# Altium PCB BreakoutPcbDoc.PcbDoc
Units mil, origin at the board's own origin, x right, y up, seen from the top; angles counter-clockwise.
Board outline 1256 x 1006 mil, 2 copper layers (Top Layer, Bottom Layer); 3 components, 8 nets, 43 pads, 1 vias.
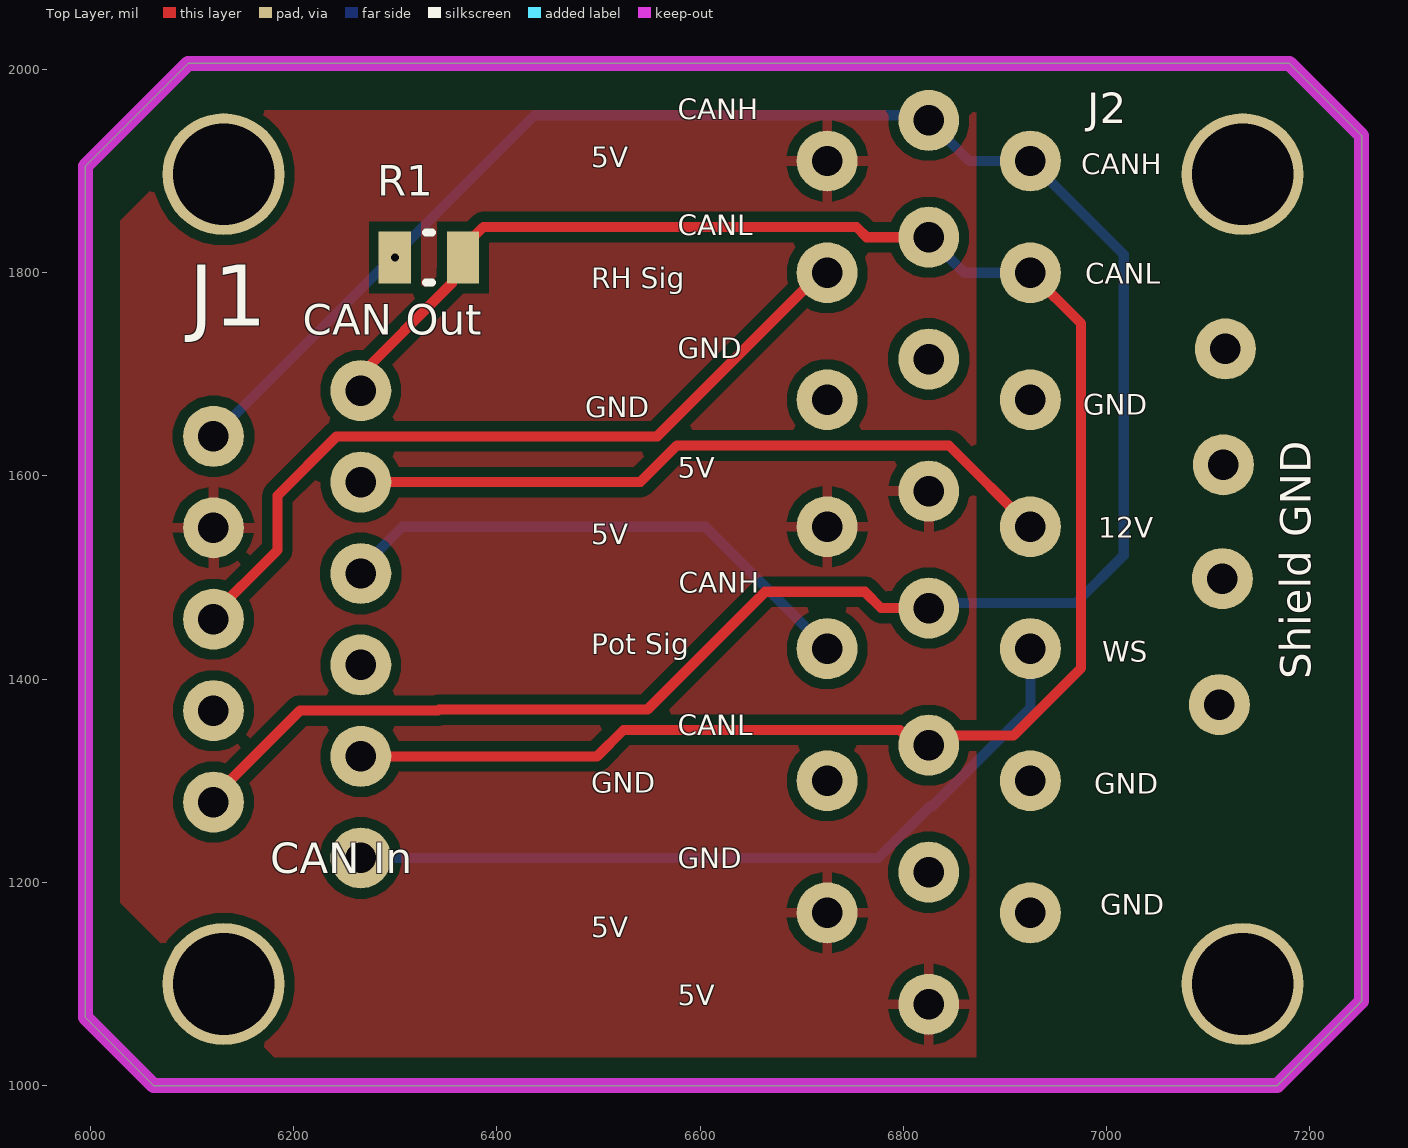
[diagram p0: Top Layer view]
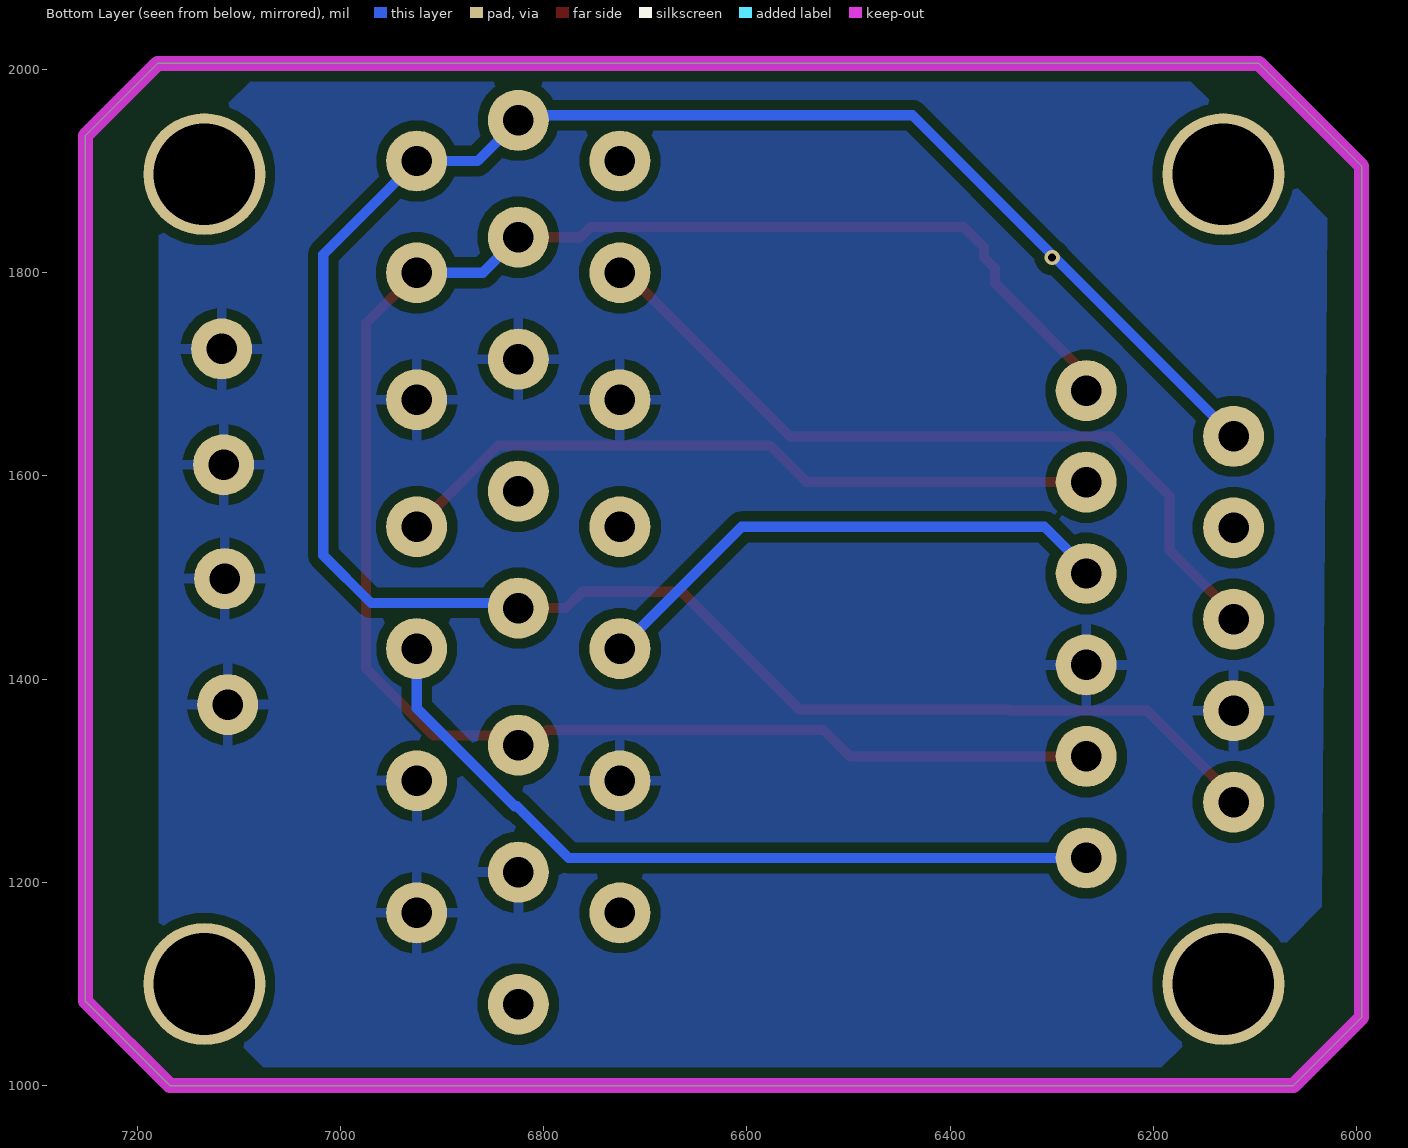
[diagram p1: Bottom Layer view, seen from below]

## Layer stack, top to bottom
Top Solder: solder mask 0.4, Solder Resist, Dk 3.5
Top Layer: signal copper 1.4
Dielectric 1: dielectric 12.6, FR-4, Dk 4.8
Bottom Layer: signal copper 1.4
Bottom Solder: solder mask 0.4, Solder Resist, Dk 3.5

## Board outline
5995,1067 6062,1000 7168,1000 7251,1083 7251,1935 7180,2006 6096,2006 5995,1905

## Design rules (kind name [scope] priority, off if disabled: settings)
Clearance [All] p1: gap=10 ignorepadtopadclearanceinfootprint=FALSE except(0: Arc-Hole Track-Hole SMDPad-Hole THPad-Hole Via-Hole Fill-Hole Poly-Hole Region-Hole Text-Hole)
PolygonConnect [All] p1: connectstyle=Relief reliefconductorwidth=10 reliefentries=4 polygonreliefangle="90 Angle" airgapwidth=10
RoutingVias [All] p1: holewidth=28 width=50 viastyle="Through Hole" minholewidth=28 minwidth=50 maxholewidth=28 maxwidth=50
SolderMaskExpansion [All] p1: expansion=4 istentingtop=FALSE
Width [All] p1: maxlimit=10 minlimit=10 preferedwidth=10
30 further rules are at their usual default settings.

## Components (designator, comment, footprint, x,y, rotation, side; value= is the part's Value field where it differs from the comment)
J1 "Input Items" Input 6121,1639 r0 top
J2 "Output" Output 6825,1950 r0 top
R1 "CRCW0805120RFKEA" FP-CRCW0805-e3-IPC_C 6333,1815 r0 top

## Footprints (in the part's own frame and the unit in brackets; to place one, negate y for a bottom-side part, rotate by r counter-clockwise, add the part's x,y. Pads: shape width x height; smd on the part's side, far side on the other; paste and mask are expansions set on the pad)
FP-CRCW0805-e3-IPC_C [mil]
  rect 31.75x51.5 smd paste+0 mask+0: 1(-33.5,0) 2(33.5,0)
  silkscreen extent -3,-25 3,25, body extent -53,-31 53,31, height 10
Input [mil]
  round 60 hole 30: 1(0,0) 2(145,45) 3(0,-90) 4(145,-45) 5(0,-180) 6(145,-135) 7(0,-270) 8(145,-225) 9(0,-360) 10(145,-315) 11(145,-415)
Output [mil]
  round 60 hole 30: 1(-100,-40) 2(-100,-150) 3(-100,-275) 4(-100,-400) 5(-100,-520) 6(-100,-650) 7(-100,-780) 8(0,0) 9(0,-115) 10(0,-235) 11(0,-365) 12(0,-480) 13(0,-615) 14(0,-740) 15(0,-870) 16(100,-40) 17(100,-150) 18(100,-275) 19(100,-400) 20(100,-520) 21(100,-650) 22(100,-780)

## Part data
J1: library part Input
R1: library part CMP-02407-007854-1, "RES Thick Film, 120Ω, 1%, 0.125W, 100ppm/°C, 0805", Case Code (Imperial)=0805, Case Code (Metric)=2012, Max Operating Temperature=155°C, Max Power Dissipation=125mW, Min Operating Temperature=-55°C, Package Quantity=10, Resistance=120R, Temperature Coefficient=100ppm/°C, Tolerance=1%, Voltage Rating=150V, Case/Package=0805, Composition="Thick Film", Contact Plating=Tin, Depth=1.25mm, Features="Automotive AEC-Q200", Height=0.45mm, Lead Free="Lead Free", Length=2mm, Military Standard=Not, Mount="Surface Mount", Number of Terminations=2, Packaging="Tape and Reel", Power Rating=125mW, Radiation Hardening=No, Termination=SMD/SMT, Voltage Rating (DC)=150V, Weight=0.000194oz, Width=1.25mm

## Free pads (board coordinates)
  round 60 hole 30: 2(7117,1725) 3(7115,1611) 4(7114,1499) 5(7111,1375)
  round 120 hole 100: ""(6131,1100) ""(6131,1897) ""(7134,1100) ""(7134,1897)

## Via types
v1: diameter 15, hole 8, Top Layer to Bottom Layer, 1 vias

## Nets (pads, with @x,y where several pads share a name; then routed paths per layer and width w, separated by ;. In a path a pad name is that pad's centre, name@x,y a point inside that pad or via, vN(x,y) a via of type N, cw(c..) or ccw(c..) an arc to the next point about the centre after c; other vN are vias at no path point)
+5: J1.3 J2.1 J2.4 J2.7 J2.11 J2.15
+12: J1.4 J2.19 | length 712
  Top Layer w10: J1.4@6261,1594 6541.08,1594 6577.08,1630 6845,1630 J2.19
CANH: J1.1 J1.9 J2.8 J2.12 J2.16 R1.1 | length 2401.6
  Top Layer w10: J1.9@6116,1279 6206,1369 6342,1369 6343,1370 6548,1370 6664,1486 6762,1486 6778,1470 J2.12 ; J2.8@6820,1955 J2.8
  Bottom Layer w10: J1.1 6437,1955 6820,1955 J2.8 6865,1910 J2.16 7017,1818 7017,1522 6970,1475 6830,1475 J2.12
  other v1: 6299.5,1815
CANL: J1.2 J1.10 J2.9 J2.13 J2.17 R1.2 | length 1928.7
  Top Layer w10: J1.10@6261,1324 6498.58,1324 6524.58,1350 6796.47,1350 J2.13@6811.47,1335 ; J1.2@6261,1684 6261,1695 6355.62,1789.62 6355.62,1804.12 R1.2 6366.5,1824.88 6386.62,1845 6753.92,1845 6763.92,1835 J2.9 ; J2.13 6834.57,1344.57 6908.57,1344.57 6975,1411 6975,1750 J2.17
  Bottom Layer w10: J2.9 6860,1800 J2.17
GND: J1.7 J1.8 J2.3 J2.6 J2.10 J2.14 J2.18 J2.21 J2.22 pad.2 pad.3 pad.4 pad.5
PotSig: J1.6 J2.5 | length 532.8
  Bottom Layer w10: J1.6@6261,1504 6307,1550 6605,1550 J2.5
RideHeightSig: J1.5 J2.2 | length 781.7
  Top Layer w10: J1.5@6116,1459 6183.96,1526.96 6183.96,1580.6 6242.36,1639 6557.8,1639 6718.8,1800 J2.2
WheelSpeedSig: J1.11 J2.20 | length 778.7
  Bottom Layer w10: J1.11 6775.36,1224 6826.32,1274.96 6828.6,1274.96 6925,1371.36 J2.20

## Polygon pours and split planes (outlines as drawn)
+5 on Top Layer "NONET_L-01_P-001" (solid, pour order 0): 6029,1851 6138,1960 6872,1960 6872,1099 6872,1028 6181,1028 6029,1180
GND on Bottom Layer "NONET_L-01_P-001" (solid, pour order 1): 6034.01,1175.99 6192,1018 7076,1018 7179,1121 7179,1898 7083,1994 6169,1994 6028.69,1853.69

## Keep-outs
Keep-Out Layer:
  the board outline again, w15

## Silkscreen, mask and mechanical layers (free items; w line width, h text height)
Top Overlay:
  text "CANH" at 6578,1951 h20
  text "5V" at 6493,1904 h20
  text "CANH" at 6975,1897 h20
  text "CANL" at 6578,1837 h20
  text "CANL" at 6979,1789 h20
  text "RH Sig" at 6493,1784.66 h20
  text "CAN Out" at 6209,1739 h30
  text "GND" at 6578,1716 h20
  text "GND" at 6977,1660 h20
  text "GND" at 6487,1658 h20
  text "5V" at 6578,1598 h20
  text "12V" at 6992,1539 h20
  text "5V" at 6493,1533 h20
  text "CANH" at 6579,1485 h20
  text "Pot Sig" at 6493,1424.66 h20
  text "WS" at 6996,1417 h20
  text "Shield GND" at 7201,1400 h30 r90
  text "CANL" at 6578,1345 h20
  text "GND" at 6493,1288 h20
  text "GND" at 6988,1287 h20
  text "GND" at 6578,1214 h20
  text "CAN In" at 6177,1209 h30
  text "GND" at 6994,1168 h20
  text "5V" at 6493,1146 h20
  text "5V" at 6578,1079 h20